# Altium PCB Space_OUT.PcbDoc (part 1 of 3)
Units mm, origin at the board's own origin, x right, y up, seen from the top; angles counter-clockwise.
Board outline 300 x 100 mm, 4 copper layers (Top Layer, MidLayer1, MidLayer2, Bottom Layer); 157 components, 49 nets, 745 pads, 302 vias.
Unrouted connection lines stored in the file: 3.
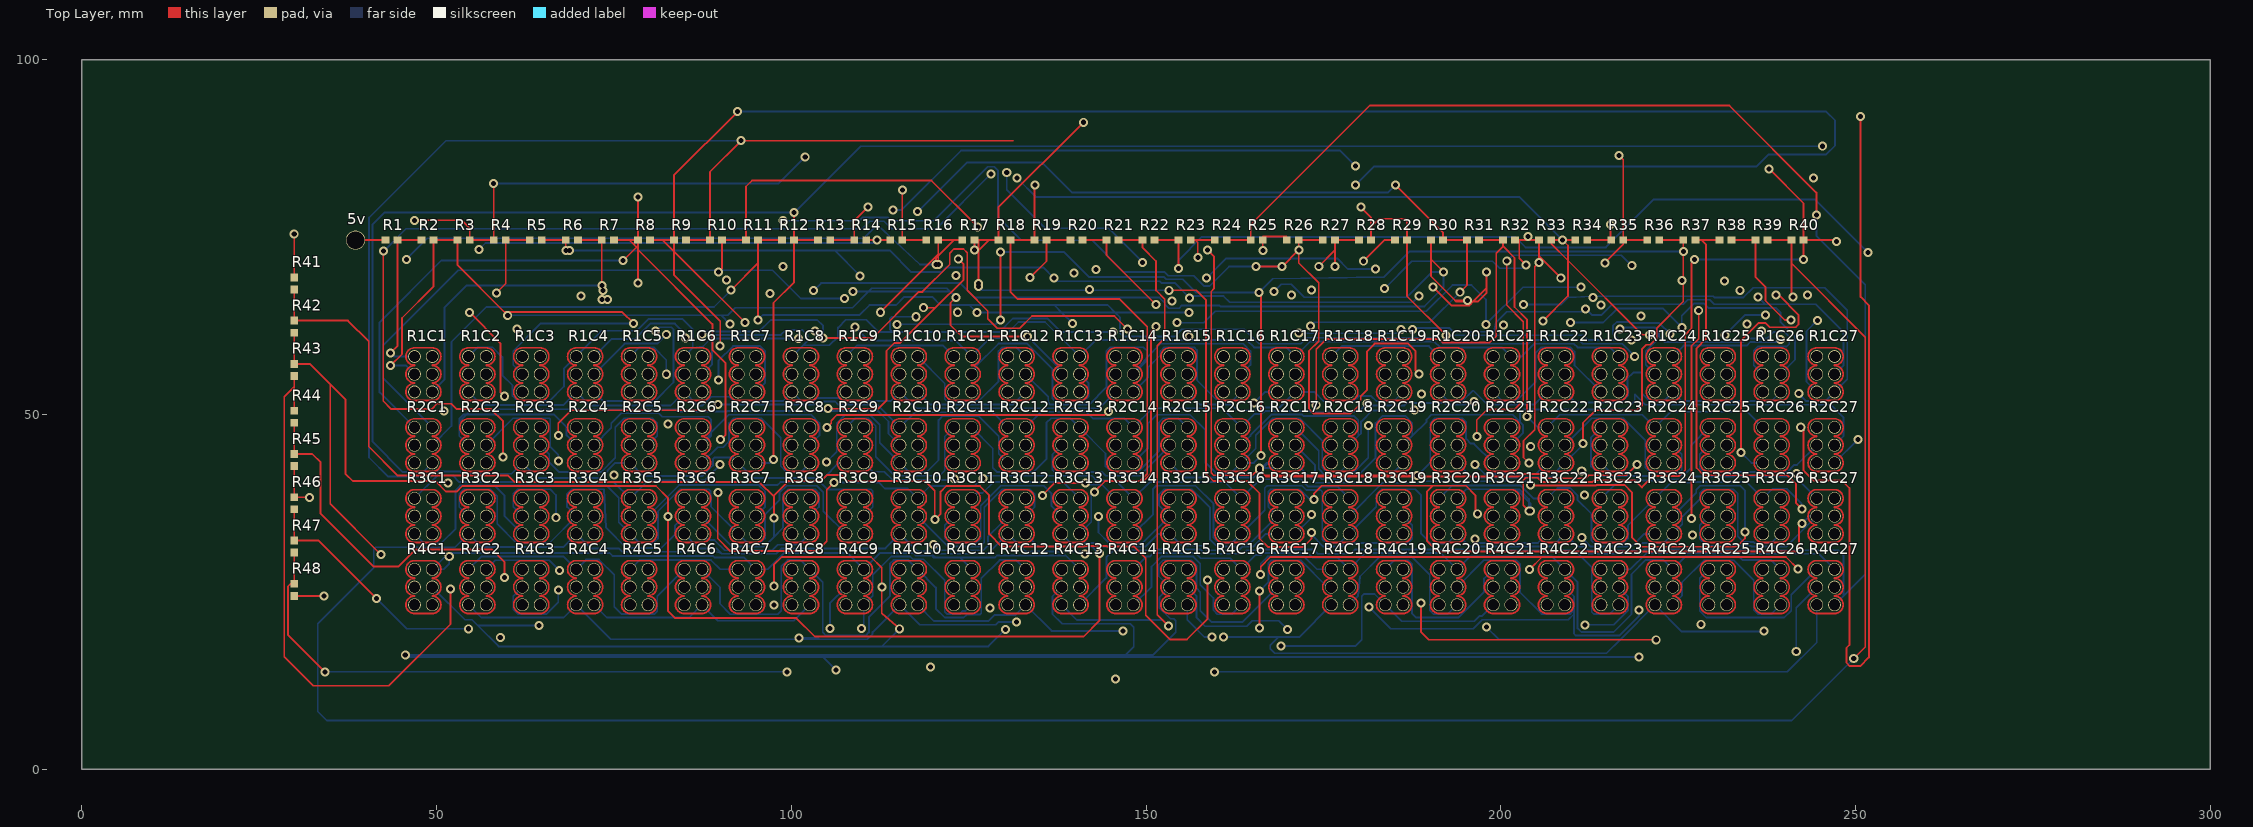
[diagram p0: Top Layer view]
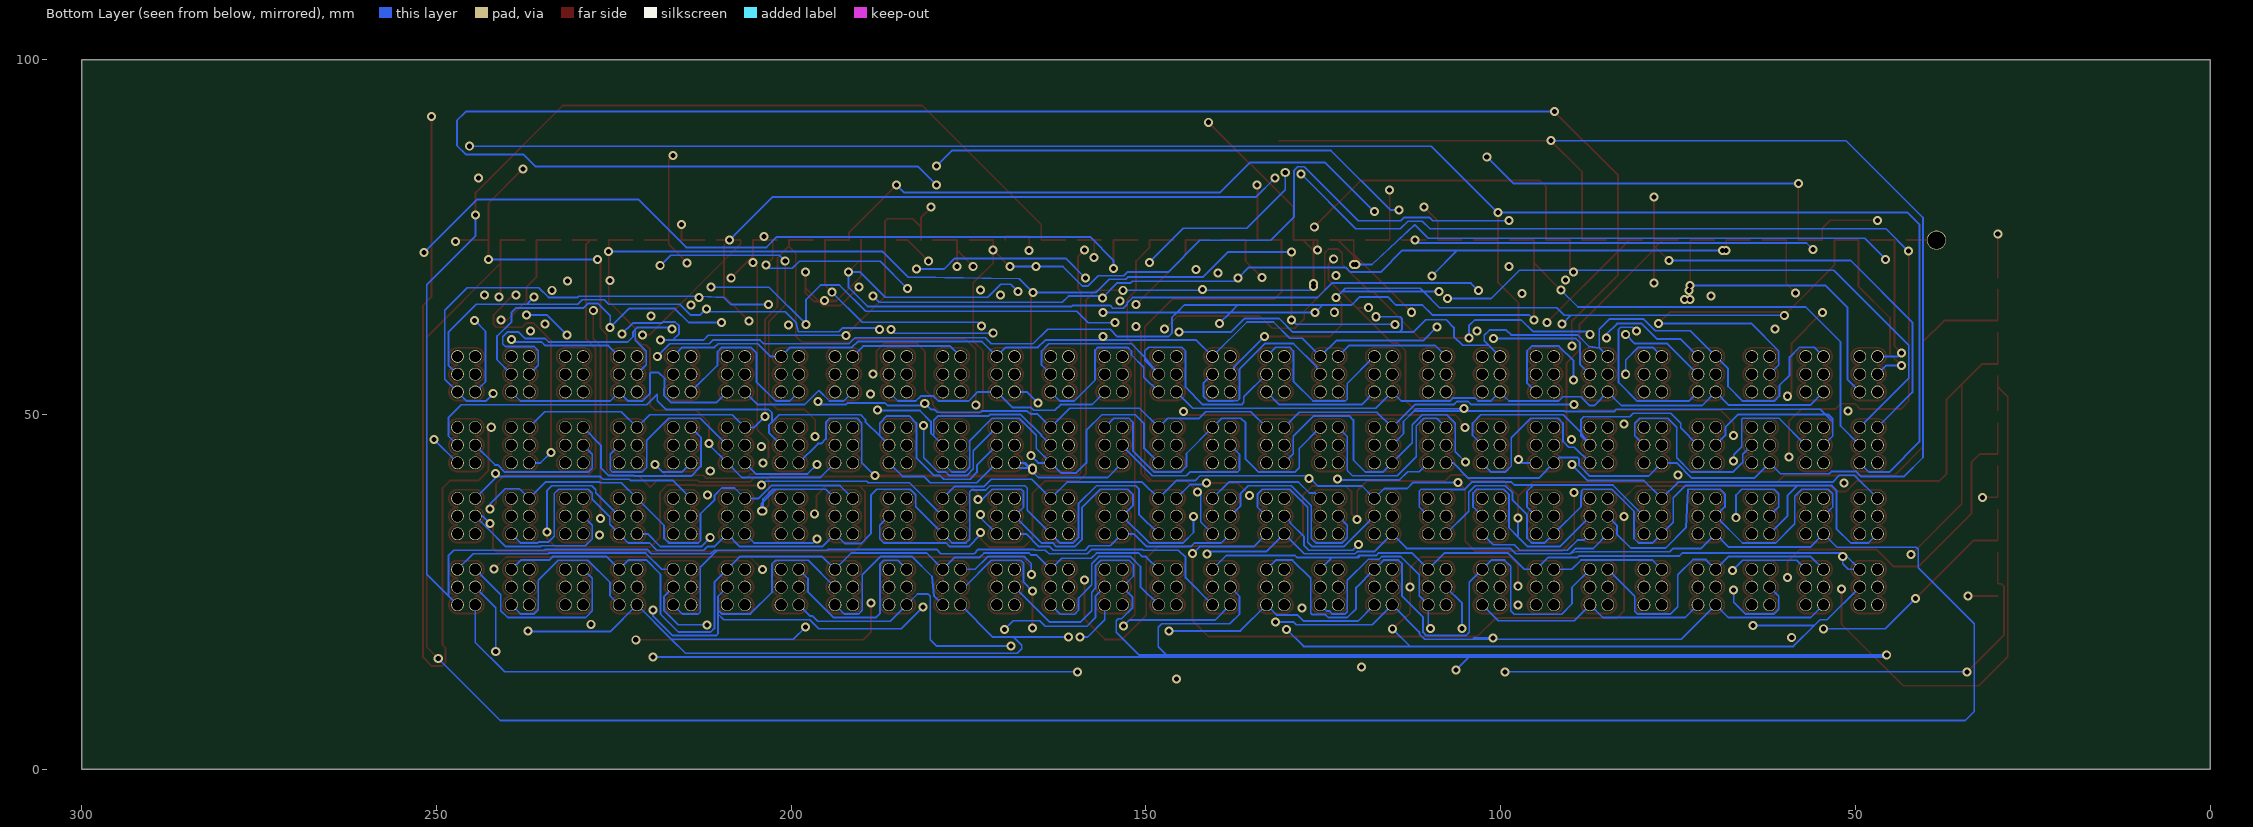
[diagram p1: Bottom Layer view, seen from below]
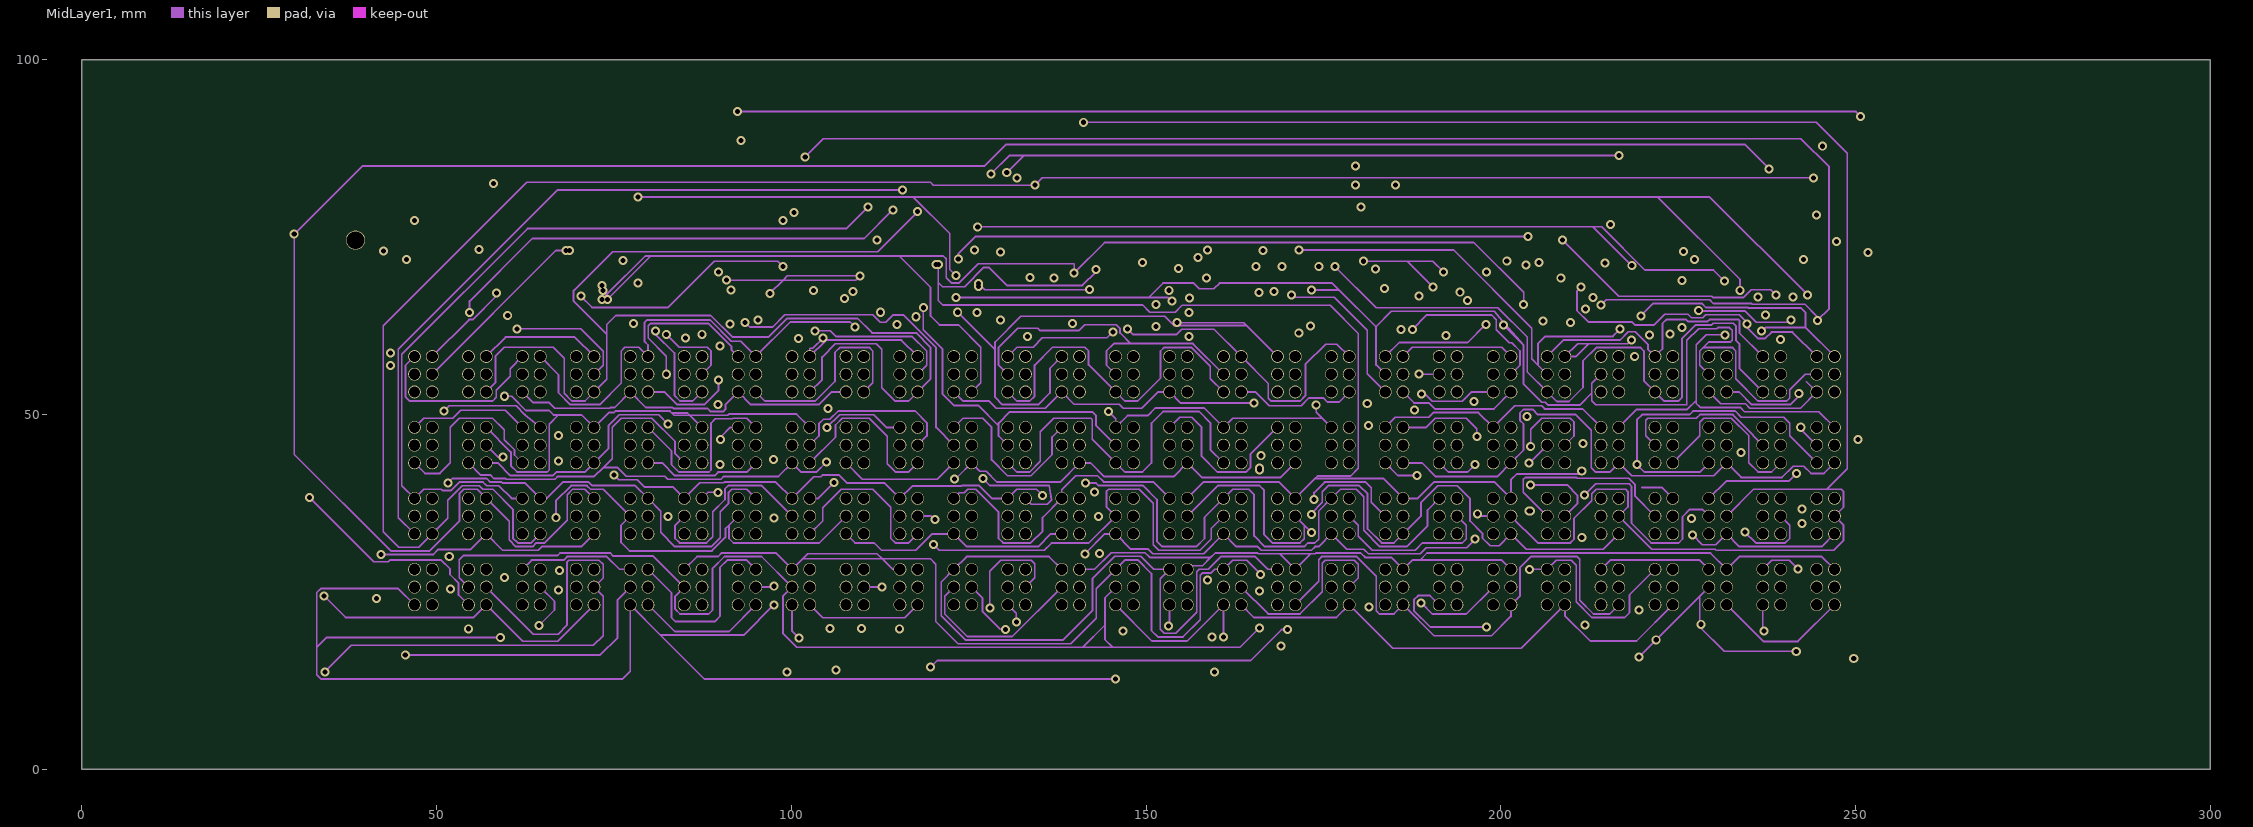
[diagram p2: MidLayer1]
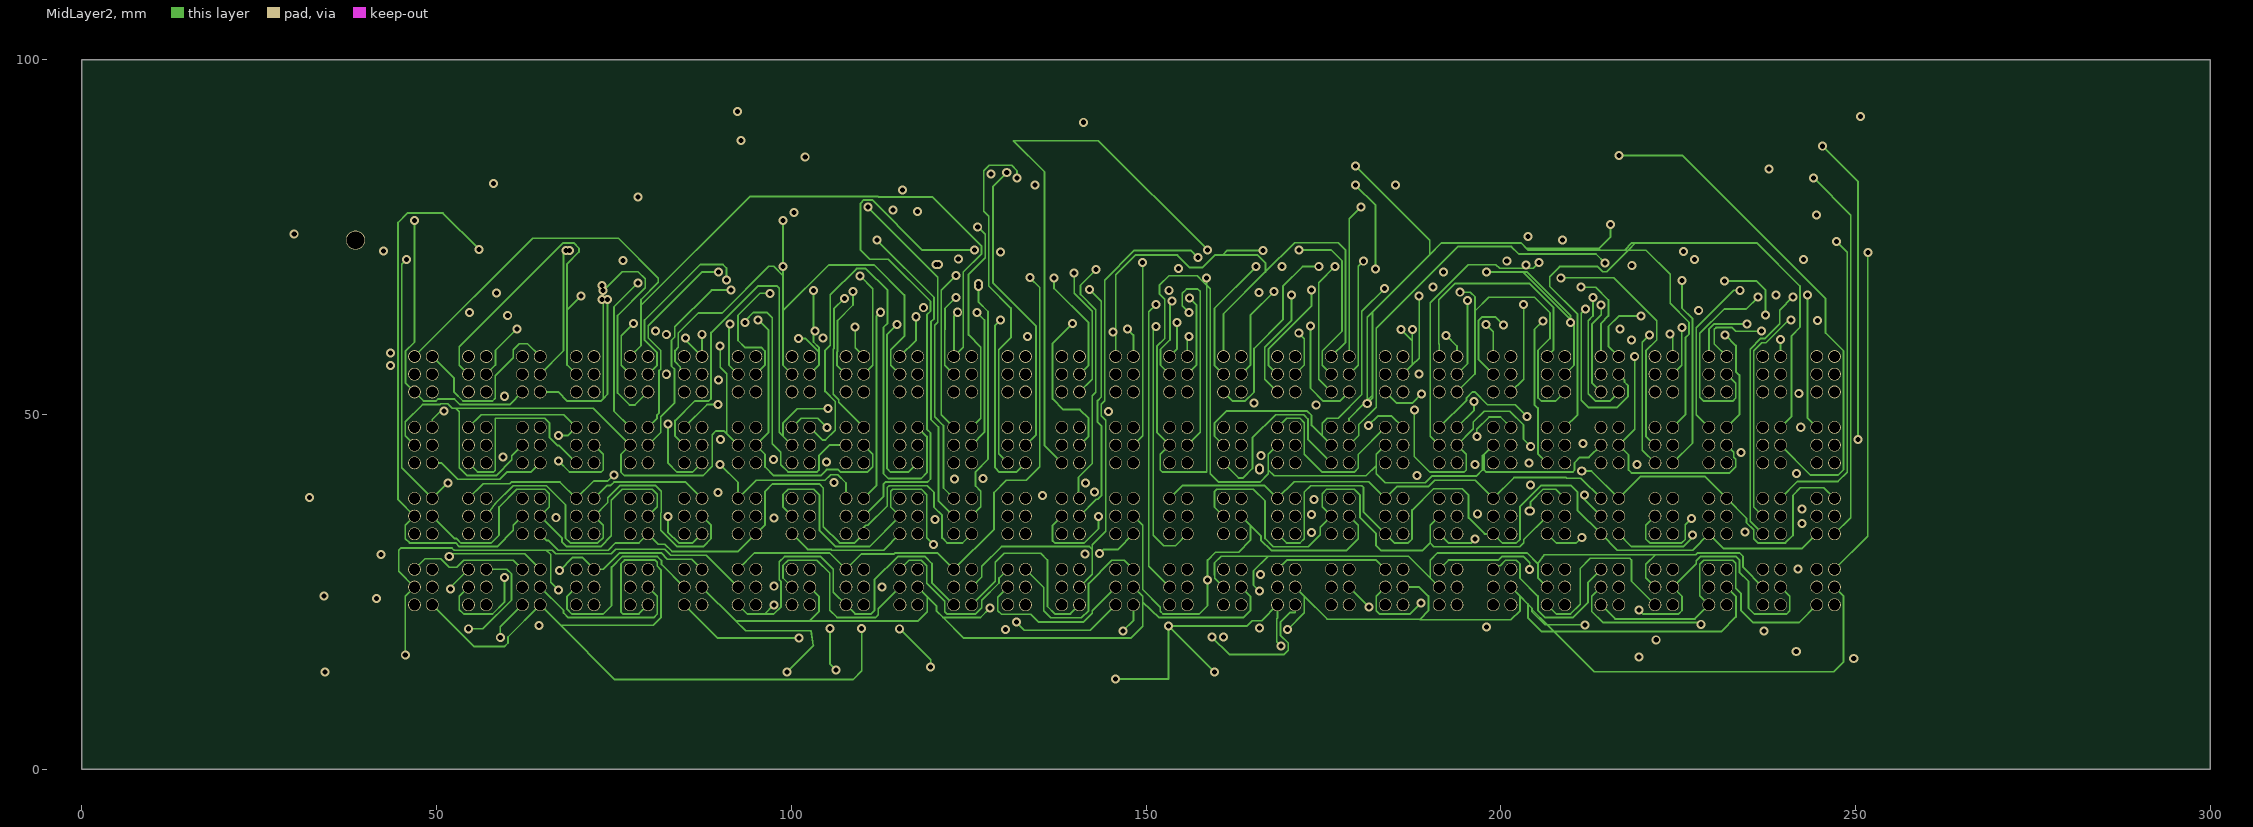
[diagram p3: MidLayer2]

## Layer stack, top to bottom
Top Layer: signal copper 0.0356
Dielectric: core 0.32, FR-4, Dk 4.8
MidLayer1: signal copper 0.0356
Dielectric: prepreg 0.32, FR-4, Dk 4.8
MidLayer2: signal copper 0.0356
Dielectric: core 0.32, FR-4, Dk 4.8
Bottom Layer: signal copper 0.0356

## Board outline
0,0 300,0 300,100 0,100 0,0

## Design rules (kind name [scope] priority, off if disabled: settings)
Clearance [All] p1: gap=0.254
PolygonConnect [All] p1: connectstyle=Relief reliefconductorwidth=0.254 reliefentries=4 polygonreliefangle="90 Angle"
RoutingVias [All] p1: holewidth=0.711 width=1.27 viastyle="Through Hole" minholewidth=0.711 minwidth=1.27 maxholewidth=0.711 maxwidth=1.27
SilkscreenOverComponentPads [All] p1: minsilkscreentomaskgap=0.254
SolderMaskExpansion [All] p1: expansion=0.102
TestPointUsage [All] p1: valid=0 allowmultiple=FALSE
Testpoint [All] p1: side=15 testpointundercomponent=TRUE minsize=1.016 maxsize=2.54 preferedsize=1.524 minholesize=0 maxholesize=1.016 preferedholesize=0.813 testpointgrid=0.025 style=1023 order=0-112345678
Width [All] p1: maxlimit=0.254 minlimit=0.254 preferedwidth=0.254
23 further rules are at their usual default settings.

## Components (designator, comment, footprint, x,y, rotation, side; value= is the part's Value field where it differs from the comment)
5v "5v" 5v 38.608,74.549 r180 top
R1 "ERA3Y" ERA-0603 43.688,74.549 r180 top
R1C1 "BC-ASS[3]" BC-ASS[3] 46.924,53.161 r0 top
R1C2 "BC-ASS[3]" BC-ASS[3] 54.524,53.161 r0 top
R1C3 "BC-ASS[3]" BC-ASS[3] 62.124,53.161 r0 top
R1C4 "BC-ASS[3]" BC-ASS[3] 69.724,53.161 r0 top
R1C5 "BC-ASS[3]" BC-ASS[3] 77.324,53.161 r0 top
R1C6 "BC-ASS[3]" BC-ASS[3] 84.924,53.161 r0 top
R1C7 "BC-ASS[3]" BC-ASS[3] 92.524,53.161 r0 top
R1C8 "BC-ASS[3]" BC-ASS[3] 100.124,53.161 r0 top
R1C9 "BC-ASS[3]" BC-ASS[3] 107.724,53.161 r0 top
R1C10 "BC-ASS[3]" BC-ASS[3] 115.324,53.161 r0 top
R1C11 "BC-ASS[3]" BC-ASS[3] 122.924,53.161 r0 top
R1C12 "BC-ASS[3]" BC-ASS[3] 130.524,53.161 r0 top
R1C13 "BC-ASS[3]" BC-ASS[3] 138.124,53.161 r0 top
R1C14 "BC-ASS[3]" BC-ASS[3] 145.724,53.161 r0 top
R1C15 "BC-ASS[3]" BC-ASS[3] 153.324,53.161 r0 top
R1C16 "BC-ASS[3]" BC-ASS[3] 160.924,53.161 r0 top
R1C17 "BC-ASS[3]" BC-ASS[3] 168.524,53.161 r0 top
R1C18 "BC-ASS[3]" BC-ASS[3] 176.124,53.161 r0 top
R1C19 "BC-ASS[3]" BC-ASS[3] 183.724,53.161 r0 top
R1C20 "BC-ASS[3]" BC-ASS[3] 191.324,53.161 r0 top
R1C21 "BC-ASS[3]" BC-ASS[3] 198.924,53.161 r0 top
R1C22 "BC-ASS[3]" BC-ASS[3] 206.524,53.161 r0 top
R1C23 "BC-ASS[3]" BC-ASS[3] 214.124,53.161 r0 top
R1C24 "BC-ASS[3]" BC-ASS[3] 221.724,53.161 r0 top
R1C25 "BC-ASS[3]" BC-ASS[3] 229.324,53.161 r0 top
R1C26 "BC-ASS[3]" BC-ASS[3] 236.924,53.161 r0 top
R1C27 "BC-ASS[3]" BC-ASS[3] 244.524,53.161 r0 top
R2 "ERA3Y" ERA-0603 48.768,74.549 r0 top
R2C1 "BC-ASS[3]" BC-ASS[3] 46.924,43.161 r0 top
R2C2 "BC-ASS[3]" BC-ASS[3] 54.524,43.161 r0 top
R2C3 "BC-ASS[3]" BC-ASS[3] 62.124,43.161 r0 top
R2C4 "BC-ASS[3]" BC-ASS[3] 69.724,43.161 r0 top
R2C5 "BC-ASS[3]" BC-ASS[3] 77.324,43.161 r0 top
R2C6 "BC-ASS[3]" BC-ASS[3] 84.924,43.161 r0 top
R2C7 "BC-ASS[3]" BC-ASS[3] 92.524,43.161 r0 top
R2C8 "BC-ASS[3]" BC-ASS[3] 100.124,43.161 r0 top
R2C9 "BC-ASS[3]" BC-ASS[3] 107.724,43.161 r0 top
R2C10 "BC-ASS[3]" BC-ASS[3] 115.324,43.161 r0 top
R2C11 "BC-ASS[3]" BC-ASS[3] 122.924,43.161 r0 top
R2C12 "BC-ASS[3]" BC-ASS[3] 130.524,43.161 r0 top
R2C13 "BC-ASS[3]" BC-ASS[3] 138.124,43.161 r0 top
R2C14 "BC-ASS[3]" BC-ASS[3] 145.724,43.161 r0 top
R2C15 "BC-ASS[3]" BC-ASS[3] 153.324,43.161 r0 top
R2C16 "BC-ASS[3]" BC-ASS[3] 160.924,43.161 r0 top
R2C17 "BC-ASS[3]" BC-ASS[3] 168.524,43.161 r0 top
R2C18 "BC-ASS[3]" BC-ASS[3] 176.124,43.161 r0 top
R2C19 "BC-ASS[3]" BC-ASS[3] 183.724,43.161 r0 top
R2C20 "BC-ASS[3]" BC-ASS[3] 191.324,43.161 r0 top
R2C21 "BC-ASS[3]" BC-ASS[3] 198.924,43.161 r0 top
R2C22 "BC-ASS[3]" BC-ASS[3] 206.524,43.161 r0 top
R2C23 "BC-ASS[3]" BC-ASS[3] 214.124,43.161 r0 top
R2C24 "BC-ASS[3]" BC-ASS[3] 221.724,43.161 r0 top
R2C25 "BC-ASS[3]" BC-ASS[3] 229.324,43.161 r0 top
R2C26 "BC-ASS[3]" BC-ASS[3] 236.924,43.161 r0 top
R2C27 "BC-ASS[3]" BC-ASS[3] 244.524,43.161 r0 top
R3 "ERA3Y" ERA-0603 53.848,74.549 r180 top
R3C1 "BC-ASS[3]" BC-ASS[3] 46.924,33.161 r0 top
R3C2 "BC-ASS[3]" BC-ASS[3] 54.524,33.161 r0 top
R3C3 "BC-ASS[3]" BC-ASS[3] 62.124,33.161 r0 top
R3C4 "BC-ASS[3]" BC-ASS[3] 69.724,33.161 r0 top
R3C5 "BC-ASS[3]" BC-ASS[3] 77.324,33.161 r0 top
R3C6 "BC-ASS[3]" BC-ASS[3] 84.924,33.161 r0 top
R3C7 "BC-ASS[3]" BC-ASS[3] 92.524,33.161 r0 top
R3C8 "BC-ASS[3]" BC-ASS[3] 100.124,33.161 r0 top
R3C9 "BC-ASS[3]" BC-ASS[3] 107.724,33.161 r0 top
R3C10 "BC-ASS[3]" BC-ASS[3] 115.324,33.161 r0 top
R3C11 "BC-ASS[3]" BC-ASS[3] 122.924,33.161 r0 top
R3C12 "BC-ASS[3]" BC-ASS[3] 130.524,33.161 r0 top
R3C13 "BC-ASS[3]" BC-ASS[3] 138.124,33.161 r0 top
R3C14 "BC-ASS[3]" BC-ASS[3] 145.724,33.161 r0 top
R3C15 "BC-ASS[3]" BC-ASS[3] 153.324,33.161 r0 top
R3C16 "BC-ASS[3]" BC-ASS[3] 160.924,33.161 r0 top
R3C17 "BC-ASS[3]" BC-ASS[3] 168.524,33.161 r0 top
R3C18 "BC-ASS[3]" BC-ASS[3] 176.124,33.161 r0 top
R3C19 "BC-ASS[3]" BC-ASS[3] 183.724,33.161 r0 top
R3C20 "BC-ASS[3]" BC-ASS[3] 191.324,33.161 r0 top
R3C21 "BC-ASS[3]" BC-ASS[3] 198.924,33.161 r0 top
R3C22 "BC-ASS[3]" BC-ASS[3] 206.524,33.161 r0 top
R3C23 "BC-ASS[3]" BC-ASS[3] 214.124,33.161 r0 top
R3C24 "BC-ASS[3]" BC-ASS[3] 221.724,33.161 r0 top
R3C25 "BC-ASS[3]" BC-ASS[3] 229.324,33.161 r0 top
R3C26 "BC-ASS[3]" BC-ASS[3] 236.924,33.161 r0 top
R3C27 "BC-ASS[3]" BC-ASS[3] 244.524,33.161 r0 top
R4 "ERA3Y" ERA-0603 58.928,74.549 r0 top
R4C1 "BC-ASS[3]" BC-ASS[3] 46.924,23.161 r0 top
R4C2 "BC-ASS[3]" BC-ASS[3] 54.524,23.161 r0 top
R4C3 "BC-ASS[3]" BC-ASS[3] 62.124,23.161 r0 top
R4C4 "BC-ASS[3]" BC-ASS[3] 69.724,23.161 r0 top
R4C5 "BC-ASS[3]" BC-ASS[3] 77.324,23.161 r0 top
R4C6 "BC-ASS[3]" BC-ASS[3] 84.924,23.161 r0 top
R4C7 "BC-ASS[3]" BC-ASS[3] 92.524,23.161 r0 top
R4C8 "BC-ASS[3]" BC-ASS[3] 100.124,23.161 r0 top
R4C9 "BC-ASS[3]" BC-ASS[3] 107.724,23.161 r0 top
R4C10 "BC-ASS[3]" BC-ASS[3] 115.324,23.161 r0 top
R4C11 "BC-ASS[3]" BC-ASS[3] 122.924,23.161 r0 top
R4C12 "BC-ASS[3]" BC-ASS[3] 130.524,23.161 r0 top
R4C13 "BC-ASS[3]" BC-ASS[3] 138.124,23.161 r0 top
R4C14 "BC-ASS[3]" BC-ASS[3] 145.724,23.161 r0 top
R4C15 "BC-ASS[3]" BC-ASS[3] 153.324,23.161 r0 top
R4C16 "BC-ASS[3]" BC-ASS[3] 160.924,23.161 r0 top
R4C17 "BC-ASS[3]" BC-ASS[3] 168.524,23.161 r0 top
R4C18 "BC-ASS[3]" BC-ASS[3] 176.124,23.161 r0 top
R4C19 "BC-ASS[3]" BC-ASS[3] 183.724,23.161 r0 top
R4C20 "BC-ASS[3]" BC-ASS[3] 191.324,23.161 r0 top
R4C21 "BC-ASS[3]" BC-ASS[3] 198.924,23.161 r0 top
R4C22 "BC-ASS[3]" BC-ASS[3] 206.524,23.161 r0 top
R4C23 "BC-ASS[3]" BC-ASS[3] 214.124,23.161 r0 top
R4C24 "BC-ASS[3]" BC-ASS[3] 221.724,23.161 r0 top
R4C25 "BC-ASS[3]" BC-ASS[3] 229.324,23.161 r0 top
R4C26 "BC-ASS[3]" BC-ASS[3] 236.924,23.161 r0 top
R4C27 "BC-ASS[3]" BC-ASS[3] 244.524,23.161 r0 top
R5 "ERA3Y" ERA-0603 64.008,74.549 r180 top
R6 "ERA3Y" ERA-0603 69.088,74.549 r0 top
R7 "ERA3Y" ERA-0603 74.168,74.549 r180 top
R8 "ERA3Y" ERA-0603 79.248,74.549 r0 top
R9 "ERA3Y" ERA-0603 84.328,74.549 r180 top
R10 "ERA3Y" ERA-0603 89.408,74.549 r0 top
R11 "ERA3Y" ERA-0603 94.488,74.549 r180 top
R12 "ERA3Y" ERA-0603 99.568,74.549 r0 top
R13 "ERA3Y" ERA-0603 104.648,74.549 r180 top
R14 "ERA3Y" ERA-0603 109.728,74.549 r0 top
R15 "ERA3Y" ERA-0603 114.808,74.549 r180 top
R16 "ERA3Y" ERA-0603 119.888,74.549 r0 top
R17 "ERA3Y" ERA-0603 124.968,74.549 r180 top
R18 "ERA3Y" ERA-0603 130.048,74.549 r0 top
R19 "ERA3Y" ERA-0603 135.128,74.549 r180 top
R20 "ERA3Y" ERA-0603 140.208,74.549 r0 top
R21 "ERA3Y" ERA-0603 145.288,74.549 r180 top
R22 "ERA3Y" ERA-0603 150.368,74.549 r0 top
R23 "ERA3Y" ERA-0603 155.448,74.549 r180 top
R24 "ERA3Y" ERA-0603 160.528,74.549 r0 top
R25 "ERA3Y" ERA-0603 165.608,74.549 r180 top
R26 "ERA3Y" ERA-0603 170.688,74.549 r0 top
R27 "ERA3Y" ERA-0603 175.768,74.549 r180 top
R28 "ERA3Y" ERA-0603 180.848,74.549 r180 top
R29 "ERA3Y" ERA-0603 185.928,74.549 r0 top
R30 "ERA3Y" ERA-0603 191.008,74.549 r180 top
R31 "ERA3Y" ERA-0603 196.088,74.549 r180 top
R32 "ERA3Y" ERA-0603 201.168,74.549 r180 top
R33 "ERA3Y" ERA-0603 206.248,74.549 r180 top
R34 "ERA3Y" ERA-0603 211.328,74.549 r180 top
R35 "ERA3Y" ERA-0603 216.408,74.549 r180 top
R36 "ERA3Y" ERA-0603 221.488,74.549 r180 top
R37 "ERA3Y" ERA-0603 226.568,74.549 r180 top
R38 "ERA3Y" ERA-0603 231.648,74.549 r180 top
R39 "ERA3Y" ERA-0603 236.728,74.549 r180 top
R40 "ERA3Y" ERA-0603 241.808,74.549 r180 top
R41 "ERA3Y" ERA-0603 29.972,68.453 r90 top
R42 "ERA3Y" ERA-0603 29.972,62.357 r90 top
R43 "ERA3Y" ERA-0603 29.972,56.261 r90 top
R44 "ERA3Y" ERA-0603 29.972,49.657 r90 top
R45 "ERA3Y" ERA-0603 29.972,43.561 r90 top
R46 "ERA3Y" ERA-0603 29.972,37.465 r90 top
R47 "ERA3Y" ERA-0603 29.972,31.369 r90 top
R48 "ERA3Y" ERA-0603 29.972,25.273 r90 top

## Footprints (in the part's own frame and the unit in brackets; to place one, negate y for a bottom-side part, rotate by r counter-clockwise, add the part's x,y. Pads: shape width x height; smd on the part's side, far side on the other; paste and mask are expansions set on the pad)
5v [mm]
  round 2.7 hole 2.5: 0(0,0)
BC-ASS[3] [mm] "American Standard Sign [3]"
  round 1.8 hole 1.6: 1(0,5) 2(0,2.5) 3(0,0) 4(2.5,5) 5(2.5,2.5) 6(2.5,0)
  Top Layer lines w0.254: 0,1.223 ccw(c0,0) 0,-1.223 2.5,-1.223 ccw(c2.5,0) 2.5,1.223 ; 0,1.277 cw(c0,2.5) 0,3.723 ; 0,3.777 cw(c0,5) 0,6.223 2.5,6.223 cw(c2.5,5) 2.5,3.777 ; 2.5,1.277 ccw(c2.5,2.5) 2.5,3.723
ERA-0603 [mm] "Chip Resistor; Body 1.6 x 0.8 mm (LxW typ)"
  rect 1.1x1 smd: 1(-0.85,0) 2(0.85,0)

## Part data
R1 R2 R3 R4 R5 R6 R7 R8 R9 R10 R11 R12 R13 R14 R15 R16 R17 R18 R19 R20 R21 R22 R23 R24 R25 R26 R27 R28 R29 R30 R31 R32 R33 R34 R35 R36 R37 R38 R39 R40 R41 R42 R43 R44 R45 R46 R47 R48: "Rectangular Thick Film Chip Resistor, 10 Ohm to 330k Ohm Range, 0.1% and 0.5% Tolerance, 0603 Size, 0.063 W"

## Via types
v1: diameter 1.27, hole 0.711, Top Layer to Bottom Layer, 302 vias

## Nets (pads, with @x,y where several pads share a name; then routed paths per layer and width w, separated by ;. In a path a pad name is that pad's centre, name@x,y a point inside that pad or via, vN(x,y) a via of type N, cw(c..) or ccw(c..) an arc to the next point about the centre after c; other vN are vias at no path point)
Net5v_0: 5v.0 R1.2 | length 4.2
  Top Layer w0.254: 5v.0@38.608,74.549 R1.2@42.838,74.549
NetR1_1: R1.1 R1C1.1 R1C3.1 R1C5.1 R1C7.1 R1C9.1 R1C11.1 R1C13.1 R1C15.1 R1C17.1 R1C19.1 R1C21.1 R1C23.1 R1C25.1 R1C27.1 R2.1 | length 494.5
  Top Layer w0.254: v1(43.522,58.649) 44.538,59.665 R1.1@44.538,74.549 R2.1@47.918,74.549
  MidLayer1 w0.254: R1C1.1@46.924,58.161 45.643,56.88 45.643,52.452 46.228,51.867 57.912,51.867 58.445,52.4 58.445,53.391 60.401,55.347 60.401,56.438 R1C3.1@62.124,58.161 ; v1(82.398,55.651) 82.398,58.217 79.858,60.757 79.858,62.484 80.162,62.789 88.382,62.789 91.577,59.593 91.577,59.108 R1C7.1@92.524,58.161 ; v1(123.469,64.389) 128.727,59.131 ; R1C13.1@138.124,58.161 136.474,56.511 136.474,53.023 134.823,51.372 129.755,51.372 128.727,52.4 ; v1(154.381,62.916) 163.769,62.916 164.176,62.509 ; R1C19.1@183.724,58.161 185.685,60.122 195.326,60.122 v1(197.891,62.687) ; v1(211.277,67.92) 210.74,67.383 210.74,64.625 212.344,63.021 218.465,63.021 218.875,62.611 221.615,62.611 223.101,64.097 226.377,64.097 226.873,63.602 228.467,63.602 228.905,64.04 233.597,64.04 234.669,62.968 v1(234.669,62.74) ; R1C27.1@244.524,58.161 241.09,61.595 238.15,61.595 237.261,60.706 236.22,60.706 v1@234.669,62.257 ; 128.727,52.4 128.727,59.131 ; 128.727,52.4 128.727,59.131 ; 128.727,59.131 128.727,60.198 132.359,63.83 152.654,63.83 153.975,62.509 154.381,62.509 164.176,62.509 ; 164.176,62.509 R1C17.1@168.524,58.161 164.176,62.509 ; v1@234.669,62.257 v1(234.669,62.74) ; v1@234.669,62.257 v1(234.669,62.74)
  MidLayer2 w0.254: R1C1.1@46.924,58.161 63.566,74.803 75.667,74.803 81.28,69.19 81.28,68.605 78.842,66.167 78.842,65.354 ; R1C5.1@77.324,58.161 78.842,59.679 ; v1(123.469,64.389) 122.924,63.844 R1C11.1@122.924,58.161 124.247,59.484 124.247,70.057 126.834,72.644 126.834,73.711 119.925,80.62 112.319,80.62 112.217,80.721 94.209,80.721 78.842,65.354 ; R1C15.1@153.324,58.161 154.381,59.218 v1(154.381,62.916) ; v1(197.891,62.687) 198.924,61.655 R1C21.1@198.924,58.161 ; v1(211.277,67.92) 213.36,67.92 215.163,66.116 215.163,63.881 214.124,62.842 R1C23.1@214.124,58.161 ; R1C25.1@229.324,58.161 229.324,61.976 230.088,62.74 v1(234.669,62.74) ; 78.842,59.679 78.842,65.354 ; 78.842,59.679 78.842,65.354
  Bottom Layer w0.254: v1(43.522,58.649) 44.01,58.161 R1C1.1@46.924,58.161 ; R1C5.1@77.324,58.161 78.605,59.442 80.614,59.442 82.398,57.658 v1(82.398,55.651) ; R1C9.1@107.724,58.161 109.278,59.715 121.37,59.715 R1C11.1@122.924,58.161 ; v1(154.381,62.916) 158.14,62.916 159.741,64.516 189.498,64.516 193.206,68.224 195.848,68.224 197.891,66.181 v1(197.891,62.687) 203.124,67.92 v1(211.277,67.92)
NetR1C1_2: R1C1.2 R1C3.2 R1C5.2 R1C7.2 R1C9.2 R1C11.2 R1C13.2 R1C15.2 R1C17.2 R1C19.2 R1C21.2 R1C23.2 R1C25.2 R1C27.2 R2.2 R3.2 | length 540
  Top Layer w0.254: v1(43.561,56.896) 45.161,58.496 45.161,63.576 49.618,68.033 R2.2@49.618,74.549 R3.2@52.998,74.549 52.998,71.018 ; v1(60.059,63.957) 59.602,64.414 ; v1(77.8,62.814) 76.2,64.414 60.059,64.414 59.602,64.414 ; v1(123.215,66.472) 122.453,65.71 122.453,62.56 124.028,60.985 v1(133.274,60.985) ; 52.998,71.018 59.602,64.414 ; 52.998,71.018 59.602,64.414
  MidLayer1 w0.254: v1(153.645,65.964) 153.137,66.472 150.368,66.472 ; v1(173.304,67.513) 177.216,67.513 ; R1C19.2@183.724,55.661 182.423,56.962 ; v1(200.381,62.586) 203.213,59.753 ; R1C23.2@214.124,55.661 212.827,54.364 ; R1C25.2@229.324,55.661 228.043,56.942 228.043,58.928 ; R1C27.2@244.524,55.661 242.91,55.661 240.705,53.456 240.705,52.301 240.284,51.88 236.22,51.88 233.105,54.995 233.105,58.928 232.591,59.442 228.557,59.442 ; 150.368,66.472 152.4,68.504 156.718,68.504 157.531,67.691 159.563,67.691 160.376,68.504 176.225,68.504 177.216,67.513 ; 150.368,66.472 v1(123.215,66.472) 150.368,66.472 ; 177.216,67.513 182.423,62.306 ; 177.216,67.513 182.423,62.306 ; 182.423,56.962 182.423,62.306 ; 182.423,56.962 182.423,62.306 ; 182.423,62.306 182.423,62.382 184.559,64.518 199.044,64.518 200.581,62.761 203.213,59.753 ; 203.213,59.753 203.213,54.241 205.74,51.714 206.248,51.714 206.662,51.301 211.118,51.301 212.827,53.01 ; 212.827,53.01 212.827,54.364 ; 212.827,53.01 212.827,51.892 213.36,51.359 226.191,51.359 226.212,51.38 226.212,60.426 227.864,62.078 230.429,62.078 230.581,62.23 232.207,62.23 232.613,61.823 232.613,60.452 232.359,60.198 229.313,60.198 228.557,59.442 ; 212.827,53.01 212.827,54.364 ; 228.043,58.928 228.557,59.442 ; 228.043,58.928 228.557,59.442
  MidLayer2 w0.254: R1C5.2@77.324,55.661 76.043,56.942 76.043,61.057 v1(77.8,62.814) ; v1(91.364,62.713) 91.243,62.592 91.243,56.942 R1C7.2@92.524,55.661 ; R1C9.2@107.724,55.661 106.443,56.942 106.443,58.729 106.528,58.813 106.528,63.221 108.712,65.405 v1(108.712,67.328) ; R1C11.2@122.924,55.661 121.643,56.942 121.643,61.953 121.666,61.976 121.666,64.922 v1(123.215,66.472) ; R1C15.2@153.324,55.661 152.043,56.942 152.043,59.155 153.365,60.477 153.365,65.684 v1(153.645,65.964) ; R1C17.2@168.524,55.661 167.243,56.942 167.243,59.191 173.304,65.253 v1(173.304,67.513) ; R1C21.2@198.924,55.661 196.875,57.71 196.875,63.246 197.333,63.703 199.263,63.703 v1(200.381,62.586)
  Bottom Layer w0.254: v1(43.561,56.896) 45.689,56.896 R1C1.2@46.924,55.661 ; R1C3.2@62.124,55.661 60.833,56.952 60.833,58.928 64.719,62.814 v1(77.8,62.814) ; v1(91.364,62.713) 90.119,63.957 ; v1(108.712,67.328) 110.94,67.328 ; v1(133.274,60.985) 137.617,56.642 137.617,55.661 R1C13.2@138.124,55.661 ; 90.119,63.957 91.059,63.957 92.126,65.024 108.636,65.024 110.94,67.328 ; 90.119,63.957 v1(60.059,63.957) 90.119,63.957 ; 110.94,67.328 122.359,67.328 ; 110.94,67.328 111.379,67.767 121.92,67.767 122.359,67.328 ; 122.359,67.328 v1(123.215,66.472) 122.359,67.328
NetR1C1_3: R1C1.3 R1C3.3 R1C5.3 R1C7.3 R1C9.3 R1C11.3 R1C13.3 R1C15.3 R1C17.3 R1C19.3 R1C21.3 R1C23.3 R1C25.3 R1C27.3 R3.1 R4.1 | length 537.4
  Top Layer w0.254: v1(46.939,77.343) 53.555,77.343 54.698,76.2 R3.1@54.698,74.549 R4.1@58.078,74.549 v1(58.078,82.55)
  MidLayer1 w0.254: R1C3.3@62.124,53.161 63.596,51.689 65.837,51.689 66.675,50.851 74.408,50.851 74.524,50.966 75.129,50.966 R1C5.3@77.324,53.161 79.519,50.966 83.282,50.966 83.422,50.825 88.24,50.825 88.671,50.394 90.424,50.394 90.729,50.698 90.729,51.366 R1C7.3@92.524,53.161 94.313,51.372 103.905,51.372 105.694,53.161 R1C9.3@107.724,53.161 ; v1(101.981,86.284) 104.546,88.849 242.291,88.849 246.253,84.887 246.253,64.897 v1(244.602,63.246) 244.602,63.772 242.867,65.507 235.421,65.507 235.307,65.621 229.935,65.621 229.413,66.143 214.86,66.143 v1(214.147,65.43) ; R1C11.3@122.924,53.161 124.218,51.867 127.885,51.867 128.888,50.864 135.827,50.864 R1C13.3@138.124,53.161 139.85,51.435 146.232,51.435 146.816,50.851 149.428,50.851 151.738,53.161 R1C15.3@153.324,53.161 154.898,51.587 v1(165.202,51.587) ; v1(170.485,66.802) 170.79,66.497 176.53,66.497 181.178,61.849 181.178,55.707 R1C19.3@183.724,53.161 ; v1(188.824,52.883) 189.306,52.883 190.348,51.841 194.564,51.841 195.884,53.161 R1C21.3@198.924,53.161 ; R1C25.3@229.324,53.161 230.999,51.486 234.483,51.486 235.105,50.864 242.227,50.864 R1C27.3@244.524,53.161 243.078,54.607
  MidLayer2 w0.254: v1(46.939,77.343) 46.939,60.198 45.643,58.902 45.643,54.442 R1C1.3@46.924,53.161 48.205,51.88 49.955,51.88 50.221,52.146 52.553,52.146 53.327,51.372 60.335,51.372 R1C3.3@62.124,53.161 ; R1C17.3@168.524,53.161 166.726,54.959 166.726,59.436 170.485,63.195 v1(170.485,66.802) ; R1C19.3@183.724,53.161 185.264,51.621 187.561,51.621 v1(188.824,52.883) ; R1C23.3@214.124,53.161 212.843,54.442 212.843,62.704 214.147,64.008 v1(214.147,65.43)
  Bottom Layer w0.254: v1(58.078,82.55) 98.247,82.55 v1(101.981,86.284) ; v1(165.202,51.587) 166.775,53.161 R1C17.3@168.524,53.161 ; R1C21.3@198.924,53.161 200.205,51.88 202.184,51.88 204.902,54.598 204.902,58.674 205.67,59.442 209.798,59.442 210.388,58.852 210.388,56.897 R1C23.3@214.124,53.161 ; R1C27.3@244.524,53.161 243.078,54.607 243.078,61.722 v1(244.602,63.246)
NetR1C1_4: R1C1.4 R1C3.4 R1C5.4 R1C7.4 R1C9.4 R1C11.4 R1C13.4 R1C15.4 R1C17.4 R1C19.4 R1C21.4 R1C23.4 R1C25.4 R1C27.4 R4.2 R5.2 | length 331.2
  Top Layer w0.254: v1(58.471,67.132) 59.778,68.439 R4.2@59.778,74.549 R5.2@63.158,74.549
  MidLayer1 w0.254: R1C1.4@49.424,58.161 54.611,63.348 55.118,63.348 58.471,66.7 v1(58.471,67.132) ; R1C3.4@64.624,58.161 67.208,55.577 67.208,53.041 68.878,51.372 73,51.372 76.043,54.415 76.043,58.928 76.576,59.461 78.524,59.461 R1C5.4@79.824,58.161 79.824,59.774 79.35,60.249 79.35,62.992 79.654,63.297 88.592,63.297 91.577,60.312 92.873,60.312 R1C7.4@95.024,58.161 99.88,63.017 108.306,63.017 v1(109.017,62.306) ; R1C19.4@186.224,58.161 187.524,59.461 200.124,59.461 R1C21.4@201.424,58.161 ; v1(219.735,63.881) 221.49,65.635 228.325,65.635 228.905,65.056 234.856,65.056 234.913,64.999 242.265,64.999 242.951,64.313 242.951,62.234 ; v1(236.753,61.722) 237.265,62.234 242.951,62.234 ; R1C27.4@247.024,58.161 242.951,62.234
  MidLayer2 w0.254: R1C1.4@49.424,58.161 52.502,55.083 52.502,53.137 53.759,51.88 57.912,51.88 58.305,52.273 58.305,55.448 60.833,57.976 60.833,59.104 61.673,59.944 62.841,59.944 R1C3.4@64.624,58.161 ; v1(109.017,62.306) 109.017,59.368 R1C9.4@110.224,58.161 ; R1C15.4@155.824,58.161 155.824,60.726 v1(156.083,60.985) ; R1C23.4@216.624,58.161 215.163,59.622 215.163,62.382 216.662,63.881 v1(219.735,63.881) ; R1C25.4@231.824,58.161 230.073,59.912 230.073,61.965 230.34,62.232 232.594,62.232 233.104,61.722 v1(236.753,61.722)
  Bottom Layer w0.254: v1(109.017,62.306) 110.922,60.401 123.184,60.401 R1C11.4@125.424,58.161 127.994,60.731 129.743,60.731 132.029,63.017 135.768,63.017 R1C13.4@140.624,58.161 142.921,60.458 ; v1(156.083,60.985) 155.556,60.458 ; R1C23.4@216.624,58.161 215.343,59.442 210.813,59.442 210.305,59.95 204.735,59.95 202.946,58.161 R1C21.4@201.424,58.161 200.143,59.442 191.44,59.442 190.63,60.252 173.115,60.252 R1C17.4@171.024,58.161 169.743,59.442 165.227,59.442 164.211,60.458 156.083,60.458 155.556,60.458 ; 142.921,60.458 155.556,60.458 ; 142.921,60.458 155.556,60.458
NetR1C1_5: R1C1.5 R1C3.5 R1C5.5 R1C7.5 R1C9.5 R1C11.5 R1C13.5 R1C15.5 R1C17.5 R1C19.5 R1C21.5 R1C23.5 R1C25.5 R1C27.5 R5.1 R6.1 | length 533.9
  Top Layer w0.254: R5.1@64.858,74.549 R6.1@68.238,74.549 ; v1(68.238,73.101) v1@68.238,73.609 ; v1(68.746,73.101) 68.492,73.355 v1@68.238,73.609 ; v1@68.238,73.609 R6.1@68.238,74.549 ; v1@68.238,73.609 R6.1@68.238,74.549
  MidLayer1 w0.254: R1C1.5@49.424,55.661 66.864,73.101 v1(68.238,73.101) ; v1(90.881,68.91) 98.857,68.91 ; v1(97.003,67.056) 98.857,68.91 ; v1(187.528,61.951) 189.588,64.01 198.687,64.01 199.343,63.355 199.343,61.917 201.168,60.092 201.541,60.092 202.705,58.928 202.705,56.942 R1C21.5@201.424,55.661 ; 98.857,68.91 99.466,69.52 v1(109.703,69.52) 109.093,68.91 98.857,68.91
  MidLayer2 w0.254: R1C3.5@64.624,55.661 67.917,58.954 67.917,72.78 v1(68.238,73.101) ; R1C5.5@79.824,55.661 81.105,56.942 81.105,58.697 79.35,60.452 79.35,63.297 87.173,71.12 90.373,71.12 90.881,70.612 v1(90.881,68.91) ; R1C7.5@95.024,55.661 96.305,56.942 96.305,58.928 95.791,59.442 93.472,59.442 92.507,60.407 92.507,63.957 95.606,67.056 v1(97.003,67.056) ; v1(109.703,69.52) 111.505,67.717 111.505,56.942 R1C9.5@110.224,55.661 ; v1(137.033,69.19) 137.033,67.755 141.905,62.883 141.905,56.942 R1C13.5@140.624,55.661 ; R1C15.5@155.824,55.661 157.105,56.942 157.105,65.45 v1(156.134,66.421) ; R1C17.5@171.024,55.661 172.314,56.951 172.314,60.655 v1(171.526,61.443) ; v1(185.953,61.951) 187.528,60.376 ; v1(187.528,61.951) 187.528,60.376 ; v1(188.493,66.676) 188.493,57.93 187.528,56.965 ; v1(211.963,64.872) 211.328,64.237 211.328,51.994 212.344,50.978 216.408,50.978 217.907,52.476 217.907,54.077 217.424,54.559 217.424,54.861 R1C23.5@216.624,55.661 ; R1C25.5@231.824,55.661 233.105,54.38 233.105,52.308 232.664,51.867 228.6,51.867 228.043,52.424 228.043,61.413 231.476,64.846 234.594,64.846 v1(236.271,66.523) ; 187.528,56.965 187.528,60.376 ; 187.528,56.965 187.528,60.376 ; 187.528,56.965 R1C19.5@186.224,55.661 187.528,56.965
  Bottom Layer w0.254: v1(68.238,73.101) v1(68.746,73.101) 106.121,73.101 ; v1(109.703,69.52) 106.121,73.101 ; R1C11.5@125.424,55.661 125.933,55.661 125.933,56.693 129.21,59.969 133.246,59.969 136.843,56.372 136.843,52.197 137.11,51.93 137.709,51.93 137.759,51.88 141.231,51.88 141.905,52.554 141.905,54.38 R1C13.5@140.624,55.661 ; v1(171.526,61.443) 185.445,61.443 v1(185.953,61.951) ; v1(187.528,61.951) 187.735,62.157 192.788,62.157 193.299,61.646 199.009,61.646 199.339,62.992 200.812,64.465 211.557,64.465 v1(211.963,64.872) 212.827,64.008 214.198,64.008 215.697,65.507 225.728,65.507 226.365,66.143 229.413,66.143 230.05,65.507 237.287,65.507 ; v1(188.493,66.676) 187.603,65.786 161.798,65.786 160.909,66.675 156.134,66.675 v1(156.134,66.421) 154.026,68.529 152.146,68.529 151.917,68.758 v1@137.465,68.758 ; v1(236.271,66.523) 237.287,65.507 ; R1C27.5@247.024,55.661 248.31,56.947 248.31,61.57 244.373,65.507 ; 106.121,73.101 113.894,73.101 116.942,70.053 121.183,70.053 121.844,70.714 135.509,70.714 ; 135.509,70.714 v1(137.033,69.19) ; 135.509,70.714 v1(137.033,69.19) ; v1(137.033,69.19) v1@137.465,68.758 ; v1(137.033,69.19) v1@137.465,68.758 ; 237.287,65.507 244.373,65.507 ; 237.287,65.507 244.373,65.507
NetR1C1_6: R1C1.6 R1C3.6 R1C5.6 R1C7.6 R1C9.6 R1C11.6 R1C13.6 R1C15.6 R1C17.6 R1C19.6 R1C21.6 R1C23.6 R1C25.6 R1C27.6 R6.2 R7.2 | length 549.9
  Top Layer w0.254: R6.2@69.938,74.549 R7.2@73.318,74.549 ; v1(73.318,66.192) 73.318,67.437 v1@73.318,67.627 ; v1(73.33,68.174) v1@73.318,68.185 ; v1(73.508,67.437) v1@73.318,67.627 ; v1@73.318,67.627 v1@73.318,68.174 ; v1@73.318,67.627 v1@73.318,68.174 ; v1@73.318,68.174 v1@73.318,68.185 ; v1@73.318,68.174 v1@73.318,68.185 ; v1@73.318,68.185 R7.2@73.318,74.549 ; v1@73.318,68.185 R7.2@73.318,74.549 ; v1@73.318,68.185 R7.2@73.318,74.549
  MidLayer1 w0.254: v1(73.318,66.192) 73.718,66.592 74.035,66.909 79.439,72.314 80.239,72.314 ; v1(74.117,66.192) 80.239,72.314 ; R1C5.6@79.824,53.161 82.141,53.161 83.93,51.372 87.77,51.372 89.738,53.34 v1(89.738,54.864) ; R1C7.6@95.024,53.161 96.305,51.88 103.403,51.88 106.172,54.649 106.172,58.725 106.889,59.442 110.992,59.442 111.506,58.928 111.506,54.443 R1C9.6@110.224,53.161 ; R1C11.6@125.424,53.161 126.721,54.458 126.721,59.461 123.58,62.602 120.904,62.602 119.634,63.872 119.634,67.894 115.214,72.314 ; R1C19.6@186.224,53.161 187.764,51.621 189.84,51.621 190.686,50.775 199.038,50.775 R1C21.6@201.424,53.161 ; v1(203.225,65.481) 203.225,67.183 196.19,74.219 144.17,74.219 v1(139.878,69.926) 139.878,71.222 126.34,71.222 123.622,68.504 122.606,68.504 121.844,69.266 121.844,71.907 121.437,72.314 115.214,72.314 ; R1C25.6@231.824,53.161 233.563,53.161 235.352,51.372 240.792,51.372 241.986,52.566 v1(241.986,52.934) ; 80.239,72.314 115.214,72.314
  MidLayer2 w0.254: R1C3.6@64.624,53.161 67.159,53.161 68.453,51.867 73.152,51.867 ; v1(74.117,66.192) 74.117,52.832 73.508,52.222 ; R1C5.6@79.824,53.161 77.996,51.333 77.216,51.333 75.535,53.014 75.535,63.927 79.426,67.818 79.426,69.088 78.41,70.104 76.175,70.104 73.787,67.716 v1(73.508,67.437) 73.508,66.192 73.508,52.222 ; v1(139.878,69.926) 139.878,67.056 142.413,64.521 142.413,54.95 R1C13.6@140.624,53.161 ; R1C21.6@201.424,53.161 203.225,54.962 v1(203.225,65.481) ; v1(212.979,66.446) 212.979,63.856 212.319,63.195 212.319,52.908 213.36,51.867 215.33,51.867 R1C23.6@216.624,53.161 ; 73.152,51.867 73.508,52.222 ; 73.152,51.867 73.508,52.222
  Bottom Layer w0.254: R1C1.6@49.424,53.161 51.13,54.867 51.13,65.024 54.28,68.174 v1(73.33,68.174) ; v1(89.738,54.864) 89.738,57.531 91.821,59.614 95.631,59.614 96.317,58.928 96.317,54.454 R1C7.6@95.024,53.161 ; R1C15.6@155.824,53.161 157.613,51.372 162.039,51.372 162.839,50.571 165.811,50.571 166.218,50.978 168.841,50.978 R1C17.6@171.024,53.161 173.713,53.161 174.994,51.88 179.261,51.88 179.959,52.578 181.75,52.578 182.448,51.88 184.943,51.88 R1C19.6@186.224,53.161 ; v1(203.225,65.481) 208.509,65.481 209.499,66.472 212.97,66.641 v1@213.184,66.651 ; v1(212.979,66.446) v1@213.184,66.651 ; v1(241.986,52.934) 243.053,51.867 245.73,51.867 R1C27.6@247.024,53.161 248.818,54.955 248.818,64.643 245.618,67.843 235.56,67.843 234.188,66.472 230.1,66.472 229.921,66.651 v1@213.184,66.651
NetR1C2_1: R1C2.1 R1C4.1 R1C6.1 R1C8.1 R1C10.1 R1C12.1 R1C14.1 R1C16.1 R1C18.1 R1C20.1 R1C22.1 R1C24.1 R1C26.1 R25.1 R26.1 | length 361.2
  Top Layer w0.254: v1(166.458,73.101) R25.1@166.458,74.549 166.458,75.057 169.838,75.057 R26.1@169.838,74.549
  MidLayer1 w0.254: R1C12.1@130.524,58.161 131.824,59.461 134.089,59.461 135.409,60.782 144.501,60.782 v1(145.339,61.62) ; R1C22.1@206.524,58.161 208.821,60.458 216.795,60.458 217.983,61.646 218.937,61.646 220.752,59.83 220.752,59.133 R1C24.1@221.724,58.161 222.785,59.222 222.785,62.813 223.32,63.348 226.111,63.348 226.365,63.094 229.159,63.094 229.413,63.348 233.528,63.348 233.629,63.246 233.629,61.456 R1C26.1@236.924,58.161
  MidLayer2 w0.254: R1C10.1@115.324,58.161 117.602,60.439 v1(117.602,63.754) ; v1(145.339,61.62) v1@145.724,61.235 ; R1C16.1@160.924,58.161 160.924,64.175 ; v1(166.458,73.101) 161.442,73.101 160.782,72.441 ; R1C18.1@176.124,58.161 178.13,60.167 178.13,73.152 177.089,74.193 170.942,74.193 166.827,70.079 ; R1C20.1@191.324,58.161 191.324,59.857 191.262,59.919 191.262,66.163 193.552,68.453 203.987,68.453 207.442,64.999 207.442,59.079 R1C22.1@206.524,58.161 ; v1@145.724,61.235 145.724,61.62 145.724,69.651 148.514,72.441 154.432,72.441 156.185,70.688 157.949,70.688 159.702,72.441 ; v1@145.724,61.235 R1C14.1@145.724,58.161 v1@145.724,61.235 ; 159.702,72.441 160.782,72.441 ; 159.702,72.441 160.782,72.441 ; 160.782,72.441 165.735,72.441 166.827,71.349 166.827,70.079 ; 160.924,64.175 166.827,70.079 ; 160.924,64.175 166.827,70.079
  Bottom Layer w0.254: R1C2.1@54.524,58.161 55.824,59.461 57.912,59.461 59.309,58.064 59.309,55.499 60.731,54.077 60.731,52.603 61.468,51.867 65.913,51.867 67.97,53.924 67.97,56.407 R1C4.1@69.724,58.161 73.336,61.773 78.232,61.773 79.883,63.424 84.709,63.424 86.131,62.001 86.131,59.368 ; R1C6.1@84.924,58.161 86.131,59.368 ; v1(117.602,63.754) 114.173,63.754 113.919,63.5 113.919,61.976 114.3,61.595 ; v1(145.339,61.62) 137.998,61.62 136.093,63.525 131.26,63.525 129.33,61.595 ; R1C18.1@176.124,58.161 177.577,59.614 189.871,59.614 R1C20.1@191.324,58.161 ; 86.131,59.368 87.572,59.563 89.198,61.189 98.552,61.189 99.238,61.874 101.6,61.874 102.337,61.138 102.337,60.374 101.704,59.741 ; 101.704,59.741 R1C8.1@100.124,58.161 101.704,59.741 ; 101.704,59.741 105.385,59.741 106.604,60.96 106.604,62.23 107.696,63.322 110.592,63.322 112.319,61.595 114.3,61.595 ; 114.3,61.595 129.33,61.595 ; 114.3,61.595 129.33,61.595
NetR1C2_2: R1C2.2 R1C4.2 R1C6.2 R1C8.2 R1C10.2 R1C12.2 R1C14.2 R1C16.2 R1C18.2 R1C20.2 R1C22.2 R1C24.2 R1C26.2 R26.2 R27.2 | length 569.1
  Top Layer w0.254: v1(165.532,70.815) v1(169.176,70.815) v1(171.538,73.177) ; R27.2@174.918,74.549 R26.2@171.538,74.549 ; v1(188.484,55.661) 187.96,56.185 187.96,58.953 186.944,59.969 182.22,59.969 181.153,58.903 181.153,53.467 180.264,52.578 180.264,52.019 180.01,51.765 180.01,51.308 178.816,50.114 173.66,50.114 172.974,50.8 172.974,58.953 174.335,60.314 174.335,68.536 171.538,71.333 v1(171.538,73.177) ; v1(171.538,73.177) R26.2@171.538,74.549 ; v1(171.538,73.177) R26.2@171.538,74.549
  MidLayer1 w0.254: v1(70.358,66.65) 71.933,65.075 82.652,65.075 89.154,71.577 98.12,71.577 v1(98.831,70.866) ; R1C12.2@130.524,55.661 129.235,56.95 129.235,59.461 131.902,62.128 134.747,62.128 135.077,61.798 140.513,61.798 141.351,62.636 145.796,62.636 146.355,62.078 146.355,61.468 147.853,59.969 ; R1C14.2@145.724,55.661 144.424,56.961 144.424,58.928 145.466,59.969 147.853,59.969 ; R1C16.2@160.924,55.661 156.616,59.969 ; v1(171.538,73.177) 193.329,73.177 204.356,62.151 204.356,57.829 205.232,56.953 ; v1(188.484,55.661) R1C20.2@191.324,55.661 ; v1(216.814,62.001) 215.798,60.985 206.248,60.985 205.232,59.969 205.232,56.953 ; 147.853,59.969 156.616,59.969 ; 147.853,59.969 156.616,59.969 ; 205.232,56.953 R1C22.2@206.524,55.661 205.232,56.953
  MidLayer2 w0.254: R1C2.2@54.524,55.661 53.238,56.947 53.238,59.549 67.858,74.168 69.342,74.168 70.104,73.406 70.104,72.898 68.428,71.222 68.428,64.719 ; R1C4.2@69.724,55.661 68.428,56.957 ; v1(70.358,66.65) 68.428,64.719 ; R1C6.2@84.924,55.661 84.379,55.661 84.379,56.668 83.643,57.404 83.643,58.98 84.099,59.436 84.099,61.468 86.915,64.284 90.268,64.284 96.85,70.866 97.536,70.866 98.831,69.571 ; v1(98.831,77.292) v1(98.831,70.866) ; R1C8.2@100.124,55.661 98.831,56.954 ; R1C10.2@115.324,55.661 114.043,56.942 114.043,59.128 115.951,61.036 115.951,66.802 111.709,71.044 105.283,71.044 98.831,64.592 ; R1C16.2@160.924,55.661 159.639,56.946 159.639,64.922 v1(165.532,70.815) ; v1(171.538,73.177) 176.073,73.177 177.622,71.628 177.622,61.707 174.843,58.928 174.843,56.942 R1C18.2@176.124,55.661 ; 68.428,56.957 68.428,64.719 ; 68.428,56.957 68.428,64.719 ; 98.831,56.954 98.831,64.592 ; 98.831,56.954 98.831,64.592 ; 98.831,56.954 98.831,64.592 ; 98.831,56.954 98.831,64.592 ; 98.831,64.592 98.831,69.571 ; 98.831,64.592 98.831,69.571 ; 98.831,64.592 98.831,69.571 ; 98.831,69.571 v1(98.831,70.866) ; 98.831,69.571 v1(98.831,70.866)
  Bottom Layer w0.254: v1(98.831,77.292) 109.601,77.292 110.033,77.724 113.665,77.724 114.097,77.292 120.091,77.292 127.686,84.887 128.6,84.887 129.159,84.328 129.159,77.775 132.41,74.524 142.418,74.524 146.888,70.053 152.654,70.053 153.162,69.545 156.717,69.545 158.19,68.072 158.952,68.072 161.695,70.815 v1(165.532,70.815) v1(169.176,70.815) ; v1(216.814,62.001) v1@217.043,62.23 ; R1C24.2@221.724,55.661 220.421,56.964 220.421,58.903 221.971,60.452 221.971,61.962 ; R1C26.2@236.924,55.661 235.636,56.949 235.636,58.979 236.22,59.563 240.284,59.563 240.64,59.919 240.64,60.96 240.005,61.595 238.404,61.595 237.515,60.706 234.696,60.706 234.188,60.198 223.052,60.198 222.29,60.96 222.29,61.642 221.971,61.962 ; v1@217.043,62.23 221.703,62.23 ; v1@217.043,62.23 221.703,62.23 ; 221.703,62.23 221.717,62.23 221.971,61.976 221.971,61.962 ; 221.703,62.23 221.971,61.962
NetR1C2_3: R1C2.3 R1C4.3 R1C6.3 R1C8.3 R1C10.3 R1C12.3 R1C14.3 R1C16.3 R1C18.3 R1C20.3 R1C22.3 R1C24.3 R1C26.3 R27.1 R28.2 | length 325.5
  Top Layer w0.254: v1(174.346,70.841) 176.618,73.113 ; v1(176.606,70.841) 176.618,70.852 176.618,73.113 ; R28.2@179.998,74.549 R27.1@176.618,74.549 ; 176.618,73.113 R27.1@176.618,74.549 ; 176.618,73.113 R27.1@176.618,74.549
  MidLayer1 w0.254: R1C12.3@130.524,53.161 131.805,51.88 133.604,51.88 134.305,52.581 134.305,56.937 136.83,59.461 141.376,59.461 141.91,58.928 141.91,56.975 R1C14.3@145.724,53.161 147.005,51.88 148.844,51.88 152.043,55.079 152.043,58.928 152.557,59.442 156.356,59.442 159.042,56.756 159.042,55.043 R1C16.3@160.924,53.161 ; v1(176.606,70.841) 182.421,65.026 199.591,65.026 203.721,60.896 203.721,55.964 R1C22.3@206.524,53.161 207.876,51.809 209.605,51.809 211.582,53.786 211.582,57.531 213.493,59.442 219.653,59.442 220.167,58.928 220.167,54.718 R1C24.3@221.724,53.161 223.018,51.867 224.993,51.867 225.552,52.426 225.552,60.731 227.406,62.586 229.679,62.586 229.921,62.827 232.778,62.827 233.121,62.484 233.121,60.426 233.613,59.934 233.613,56.472 R1C26.3@236.924,53.161
  MidLayer2 w0.254: R1C16.3@160.924,53.161 162.218,51.867 163.942,51.867 165.227,53.152 165.227,59.284 169.291,63.348 169.291,68.072 172.06,70.841 v1(174.346,70.841) ; R1C18.3@176.124,53.161 174.335,54.95 174.335,68.569 v1(176.606,70.841)
  Bottom Layer w0.254: R1C2.3@54.524,53.161 56.377,51.308 67.871,51.308 R1C4.3@69.724,53.161 71.653,51.232 82.995,51.232 R1C6.3@84.924,53.161 86.853,51.232 87.478,51.232 88.722,52.476 91.237,52.476 91.833,51.88 98.843,51.88 R1C8.3@100.124,53.161 101.405,51.88 103.213,51.88 103.657,52.324 106.705,52.324 107.149,51.88 114.043,51.88 R1C10.3@115.324,53.161 117.621,50.864 143.427,50.864 R1C14.3@145.724,53.161 ; R1C20.3@191.324,53.161 192.605,51.88 194.603,51.88 196.063,53.34 196.152,53.34 198.12,51.372 204.735,51.372 R1C22.3@206.524,53.161
NetR1C2_4: R1C2.4 R1C4.4 R1C6.4 R1C8.4 R1C10.4 R1C12.4 R1C14.4 R1C16.4 R1C18.4 R1C20.4 R1C22.4 R1C24.4 R1C26.4 R28.1 R29.2 | length 351
  Top Layer w0.254: v1(104.496,60.757) 111.481,60.757 117.983,67.259 118.491,67.259 122.352,71.12 122.352,72.72 122.936,73.304 124.282,73.304 124.816,72.771 124.816,67.462 127.711,64.567 127.711,63.449 129.032,62.128 132.207,62.128 133.934,63.856 145.542,63.856 v1(147.396,62.001) ; v1(180.276,79.197) 181.698,77.775 181.698,76.376 ; v1(192.3,61.141) 186.778,66.663 R29.2@186.778,74.549 186.778,77.23 186.45,77.558 182.88,77.558 181.698,76.376 ; 181.698,76.376 R28.1@181.698,74.549 181.698,76.376
  MidLayer1 w0.254: R1C2.4@57.024,58.161 59.757,60.894 69.491,60.894 R1C4.4@72.224,58.161 ; v1(104.496,60.757) 103.048,59.309 102.624,59.309 R1C8.4@102.624,58.161 104.858,60.395 104.921,60.458 115.527,60.458 R1C10.4@117.824,58.161 ; v1(147.396,62.001) 148.133,61.265 154.33,61.265 155.067,62.001 159.584,62.001 R1C16.4@163.424,58.161 167.234,54.351 167.234,52.273 167.64,51.867 171.704,51.867 172.466,52.629 172.466,57.048 175.311,59.893 176.892,59.893 R1C18.4@178.624,58.161 ; v1(218.44,60.477) 217.913,59.95 ; 212.395,59.95 217.913,59.95 ; 212.395,59.95 210.813,59.95 R1C22.4@209.024,58.161 210.606,58.161 212.395,59.95 ; 212.395,59.95 217.913,59.95
  MidLayer2 w0.254: v1(85.115,60.782) 85.115,60.47 R1C6.4@87.424,58.161 v1(87.424,61.287) ; v1(147.396,62.001) 148.224,61.174 R1C14.4@148.224,58.161 ; R1C18.4@178.624,58.161 178.638,58.161 178.638,77.56 v1(180.276,79.197) ; v1(192.3,61.141) 193.824,59.617 R1C20.4@193.824,58.161 ; v1(223.85,61.341) 224.224,60.967 R1C24.4@224.224,58.161 ; v1(239.42,60.579) 239.424,60.575 R1C26.4@239.424,58.161
  Bottom Layer w0.254: R1C4.4@72.224,58.161 74.693,60.63 78.003,60.63 80.162,62.789 83.617,62.789 85.115,61.29 v1(85.115,60.782) ; v1(87.424,61.287) 87.833,61.697 95.504,61.697 97.108,63.301 103.679,63.301 104.496,62.484 v1(104.496,60.757) ; R1C10.4@117.824,58.161 121.641,54.344 121.641,52.159 121.92,51.88 126.454,51.88 129.235,54.661 129.235,58.928 129.769,59.461 131.724,59.461 R1C12.4@133.024,58.161 ; v1(192.3,61.141) 192.303,61.138 211.657,61.138 212.318,60.477 216.662,60.477 ; v1(223.85,61.341) 222.326,62.865 218.262,62.865 218.11,63.017 216.332,63.017 215.798,62.484 215.798,61.341 216.662,60.477 ; R1C24.4@224.224,58.161 225.753,59.69 234.662,59.69 235.17,60.198 239.039,60.198 v1(239.42,60.579) ; 216.662,60.477 v1(218.44,60.477) 216.662,60.477
NetR1C2_5: R1C2.5 R1C4.5 R1C6.5 R1C8.5 R1C10.5 R1C12.5 R1C14.5 R1C16.5 R1C18.5 R1C20.5 R1C22.5 R1C24.5 R1C26.5 R29.1 R30.2 | length 482.8
  Top Layer w0.254: v1(180.619,71.577) 183.591,74.549 R29.1@185.078,74.549 ; v1(190.424,67.97) 193.04,65.354 195.301,65.354 195.58,65.354 195.796,65.57 196.139,65.913 ; v1(191.922,70.079) 190.158,71.843 ; v1(195.301,66.065) 193.548,66.065 ; 190.158,69.455 193.548,66.065 ; 190.158,69.455 190.158,71.843 ; 190.158,69.455 193.548,66.065 ; 190.158,71.843 R30.2@190.158,74.549 190.158,71.843 ; 193.548,66.065 193.7,65.913 195.301,65.913 196.139,65.913 ; 196.139,65.913 196.825,65.913 197.968,67.056 197.968,67.742 ; 196.139,65.913 197.968,67.742 ; 197.968,67.742 v1(197.968,70.053) 197.968,67.742
  MidLayer1 w0.254: v1(61.366,62.052) 70.358,62.052 73.505,58.905 73.505,56.942 R1C4.5@72.224,55.661 ; v1(82.398,61.265) 84.201,59.461 88.189,59.461 88.722,58.928 88.722,56.959 R1C6.5@87.424,55.661 ; v1(103.36,61.777) 105.512,61.777 106.322,60.966 117.067,60.966 119.105,58.928 119.105,56.942 R1C10.5@117.824,55.661 ; v1(190.424,67.97) 186.817,71.577 ; v1(191.922,70.079) 190.424,71.577 186.817,71.577 ; 186.817,71.577 v1(180.619,71.577) 186.817,71.577
  MidLayer2 w0.254: R1C2.5@57.024,55.661 58.318,56.955 58.318,59.004 v1(61.366,62.052) ; v1(101.041,60.681) 102.057,60.681 103.911,58.826 ; R1C8.5@102.624,55.661 103.911,56.948 ; v1(103.149,67.437) v1@103.149,61.777 ; v1(103.36,61.777) v1@103.149,61.777 ; R1C16.5@163.424,55.661 164.705,56.942 164.705,63.957 v1(168.058,67.31) ; R1C18.5@178.624,55.661 179.905,56.942 179.905,70.863 v1(180.619,71.577) ; R1C20.5@193.824,55.661 195.301,57.138 v1(195.301,66.065) ; R1C22.5@209.024,55.661 210.312,56.949 210.312,62.906 210.041,63.178 v1@209.804,63.414 ; v1(209.804,62.941) v1@209.804,63.414 ; R1C24.5@224.224,55.661 225.505,56.942 225.505,62.252 v1(225.501,62.255) ; 103.149,60.198 v1@103.149,61.777 ; 103.149,60.198 v1@103.149,61.777 ; 103.149,60.198 103.911,59.436 103.911,58.826 ; 103.911,56.948 103.911,58.826 ; 103.911,56.948 103.911,58.826 ; 203.165,70.053 203.708,70.053 209.804,63.957 v1@209.804,63.414 ; 203.165,70.053 v1(197.968,70.053) 203.165,70.053 ; 203.165,70.053 v1@209.804,63.414
  Bottom Layer w0.254: R1C4.5@72.224,55.661 76.532,59.969 81.102,59.969 v1(82.398,61.265) ; R1C6.5@87.424,55.661 88.849,57.086 88.849,60.122 89.408,60.681 v1(101.041,60.681) ; v1(103.149,67.437) 104.216,68.504 123.8,68.504 125.832,66.472 151.892,66.472 152.629,65.735 152.629,65.532 153.213,64.948 154.661,64.948 155.067,65.354 160.325,65.354 160.477,65.202 189.23,65.202 191.922,67.894 v1(191.922,70.079) 190.348,70.079 186.766,66.497 172.294,66.497 170.465,68.326 169.074,68.326 v1(168.058,67.31) ; R1C12.5@133.024,55.661 136.221,52.464 136.221,51.682 136.532,51.372 141.986,51.372 144.424,53.81 144.424,58.928 144.958,59.461 149.631,59.461 150.165,58.928 150.165,58.068 ; R1C16.5@163.424,55.661 164.719,56.956 164.719,58.928 163.697,59.95 152.047,59.95 150.165,58.068 ; v1(209.804,62.941) 214.427,62.941 216.383,64.897 222.86,64.897 v1(225.501,62.255) 225.501,63.906 227.23,65.635 228.6,65.635 229.237,64.999 238.76,64.999 239.395,64.364 239.395,63.078 241.452,61.021 241.452,57.689 R1C26.5@239.424,55.661 ; 150.165,58.068 150.165,57.602 R1C14.5@148.224,55.661 150.165,58.068
NetR1C2_6: R1C2.6 R1C4.6 R1C6.6 R1C8.6 R1C10.6 R1C12.6 R1C14.6 R1C16.6 R1C18.6 R1C20.6 R1C22.6 R1C24.6 R1C26.6 R30.1 R31.2 | length 512.5
  Top Layer w0.254: v1(185.166,82.296) 191.858,75.604 R30.1@191.858,74.549 R31.2@195.238,74.549 195.238,68.203 v1(194.243,67.208)
  MidLayer1 w0.254: R1C2.6@57.024,53.161 58.318,54.455 58.318,58.191 59.588,59.461 66.472,59.461 68.021,57.912 68.021,52.947 69.088,51.88 70.943,51.88 R1C4.6@72.224,53.161 74.016,54.953 ; v1(80.874,61.773) 80.874,61.316 83.541,58.649 83.541,52.667 84.328,51.88 86.143,51.88 R1C6.6@87.424,53.161 ; R1C8.6@102.624,53.161 104.354,54.891 104.354,58.072 106.232,59.95 112.013,59.95 112.776,59.187 112.776,53.732 114.638,51.87 116.533,51.87 R1C10.6@117.824,53.161 119.613,54.95 119.613,59.457 117.596,61.474 111.398,61.474 109.347,63.525 99.466,63.525 96.85,60.909 91.698,60.909 88.676,63.932 75.286,63.932 74.016,62.662 74.016,61.265 ; v1(117.831,78.562) 112.192,72.923 74.828,72.923 69.342,67.437 69.342,65.938 74.016,61.265 ; R1C16.6@163.424,53.161 165.392,53.161 167.347,51.206 171.856,51.206 172.974,52.324 174.955,52.324 175.539,51.74 177.203,51.74 R1C18.6@178.624,53.161 ; 74.016,54.953 74.016,61.265 ; 74.016,54.953 74.016,61.265
  MidLayer2 w0.254: v1(173.177,62.459) 173.177,53.696 175.006,51.867 177.33,51.867 R1C18.6@178.624,53.161 ; R1C20.6@193.824,53.161 196.364,55.701 ; v1(194.243,67.208) 195.704,67.208 196.364,66.548 196.364,64.563 ; R1C22.6@209.024,53.161 207.743,51.88 205.687,51.88 205.243,52.324 205.243,59.015 206.934,60.706 206.934,64.313 204.749,66.497 198.298,66.497 196.364,64.563 ; 196.364,55.701 196.364,64.563 ; 196.364,55.701 196.364,64.563
  Bottom Layer w0.254: R1C4.6@72.224,53.161 73.518,51.867 80.772,51.867 83.414,54.508 83.414,61.976 83.109,62.281 81.382,62.281 v1(80.874,61.773) ; R1C10.6@117.824,53.161 119.613,51.372 131.235,51.372 R1C12.6@133.024,53.161 ; v1(117.831,78.562) 124.739,85.471 135.357,85.471 139.548,81.28 184.15,81.28 v1(185.166,82.296) ; R1C14.6@148.224,53.161 150.317,55.254 150.317,56.642 152.044,58.369 152.044,58.928 152.558,59.442 156.788,59.442 157.175,59.055 157.175,54.839 160.134,51.88 162.143,51.88 R1C16.6@163.424,53.161 ; v1(173.177,62.459) 173.685,62.967 190.001,62.967 v1(194.243,67.208) ; R1C22.6@209.024,53.161 210.496,51.689 216.964,51.689 217.905,52.63 217.905,53.692 217.856,53.741 217.856,55.081 218.655,55.88 219.772,55.88 219.913,55.739 219.913,52.933 220.98,51.867 222.93,51.867 R1C24.6@224.224,53.161 225.505,51.88 238.143,51.88 R1C26.6@239.424,53.161
NetR2C1_1: R2C1.1 R2C3.1 R2C5.1 R2C7.1 R2C9.1 R2C11.1 R2C13.1 R2C15.1 R2C17.1 R2C19.1 R2C21.1 R2C23.1 R2C25.1 R2C27.1 R7.1 R8.1 | length 769.6
  Top Layer w0.254: v1(76.327,71.679) 78.207,73.558 ; v1(78.398,80.62) R8.1@78.398,74.549 ; v1(78.41,68.529) 78.41,73.211 ; v1(90.043,46.431) 90.754,47.142 90.754,57.226 88.9,59.08 88.9,62.721 78.41,73.211 ; 77.216,74.549 77.807,73.958 78.207,73.558 ; 77.216,74.549 R8.1@78.398,74.549 ; 77.216,74.549 R7.1@75.018,74.549 77.216,74.549 ; 78.207,73.558 78.398,73.367 ; 78.207,73.558 78.398,73.75 ; 78.398,73.367 78.41,73.355 78.41,73.211 ; 78.398,73.367 78.398,73.75 ; 78.398,73.367 78.398,73.223 78.41,73.211 ; 78.398,73.75 R8.1@78.398,74.549 ; 78.398,73.75 R8.1@78.398,74.549
  MidLayer1 w0.254: R2C1.1@46.924,48.161 48.217,49.454 52.324,49.454 53.442,50.571 59.714,50.571 R2C3.1@62.124,48.161 ; v1(90.043,46.431) 90.043,46.764 91.44,48.161 R2C7.1@92.524,48.161 ; R2C11.1@122.924,48.161 124.217,49.454 127,49.454 128.245,48.209 128.245,43.586 130.48,41.351 133.794,41.351 136.752,44.31 136.752,46.789 R2C13.1@138.124,48.161 ; v1(123.215,69.545) 122.352,70.409 122.352,75.489 117.221,80.62 ; R2C15.1@153.324,48.161 154.744,49.581 156.464,49.581 157.836,48.209 157.836,44.094 160.071,41.859 164.084,41.859 164.719,42.494 164.719,44.356 R2C17.1@168.524,48.161 ; R2C19.1@183.724,48.161 185.144,49.581 189.84,49.581 190.5,50.241 196.844,50.241 R2C21.1@198.924,48.161 201.969,51.206 205.74,51.206 206.172,50.775 211.51,50.775 R2C23.1@214.124,48.161 ; v1(233.705,67.488) 233.705,69.012 222.098,80.62 ; v1(243.23,66.827) 229.438,80.62 222.098,80.62 ; v1(78.398,80.62) 117.221,80.62 ; v1(78.398,80.62) 117.221,80.62 ; v1(78.398,80.62) 117.221,80.62 ; 117.221,80.62 222.098,80.62 ; 117.221,80.62 222.098,80.62
  MidLayer2 w0.254: R2C5.1@77.324,48.161 75.027,50.458 75.027,65.146 v1(78.41,68.529) ; R2C11.1@122.924,48.161 121.135,49.95 121.135,62.484 121.158,62.507 121.158,67.488 v1(123.215,69.545) ; R2C17.1@168.524,48.161 169.805,49.442 171.704,49.442 172.305,48.841 172.305,44.408 174.854,41.859 179.324,41.859 179.908,42.443 179.908,44.345 R2C19.1@183.724,48.161 ; R2C25.1@229.324,48.161 227.535,49.95 227.535,62.206 232.816,67.488 v1(233.705,67.488) ; v1(243.23,66.827) 243.23,49.455 R2C27.1@244.524,48.161
  Bottom Layer w0.254: R2C1.1@46.924,48.161 41.998,53.087 41.998,62.978 50.698,71.679 v1(76.327,71.679) ; R2C9.1@107.724,48.161 109.005,49.442 110.832,49.442 111.912,48.362 111.912,44.018 114.579,41.351 120.904,41.351 121.641,42.088 121.641,46.878 R2C11.1@122.924,48.161 ; R2C23.1@214.124,48.161 212.725,46.762 212.725,42.672 214.097,41.3 222.072,41.3 222.144,41.372 225.729,41.372 226.82,42.463 226.82,45.657 R2C25.1@229.324,48.161